# Altium PCB Receiver_PCB.PcbDoc
Units mil, origin at the board's own origin, x right, y up, seen from the top; angles counter-clockwise.
Board outline 708.66 x 1515.75 mil, 2 copper layers (Top Layer, Bottom Layer); 28 components, 25 nets, 95 pads, 67 vias.
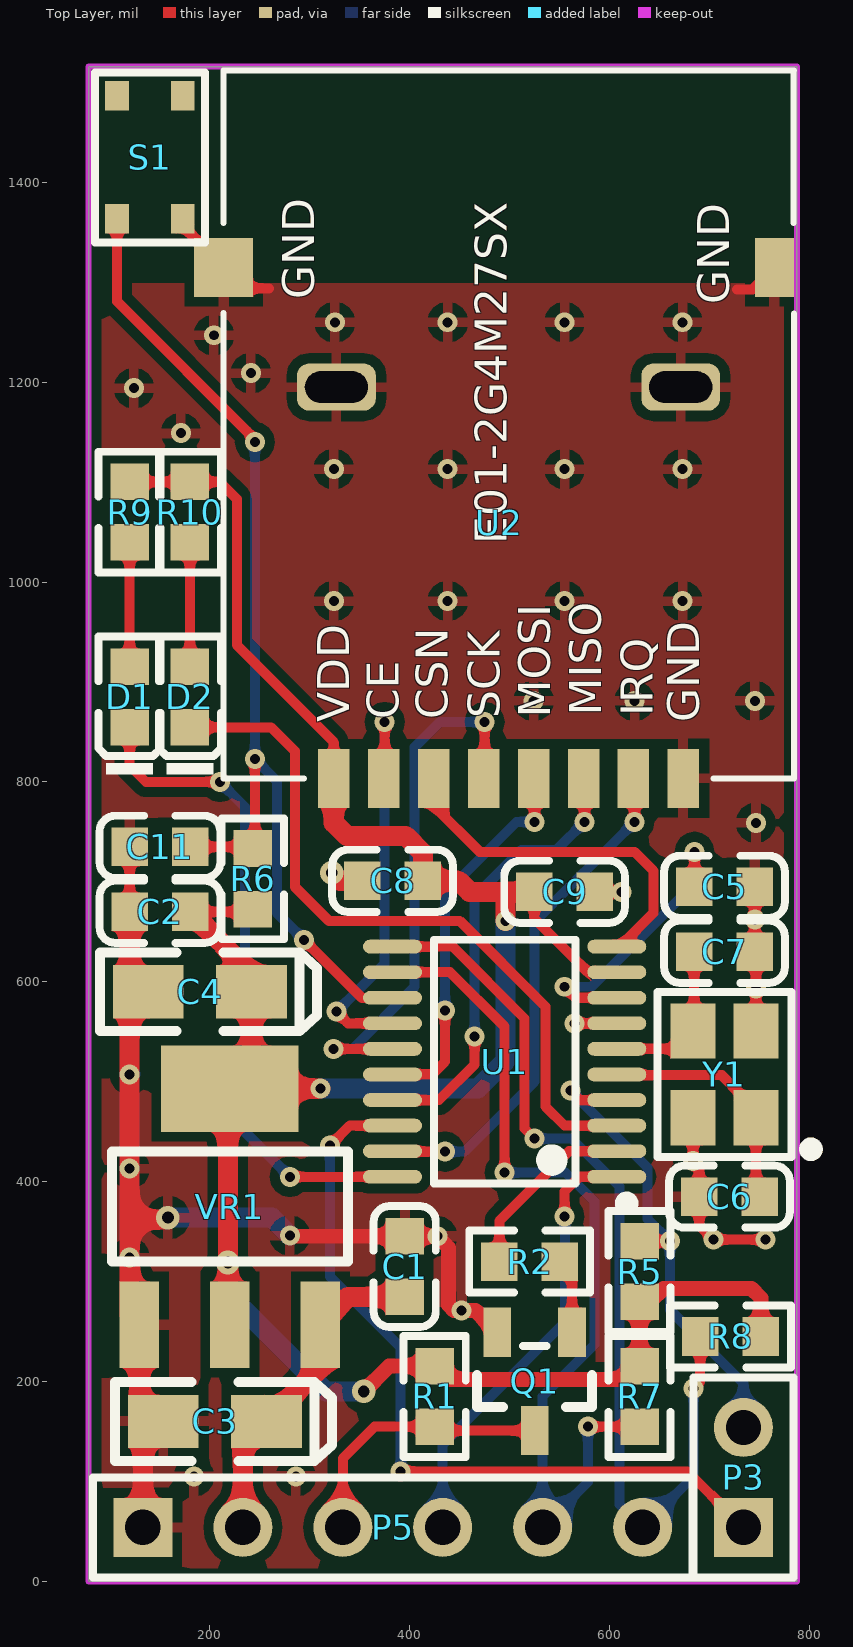
[diagram p0: Top Layer view]
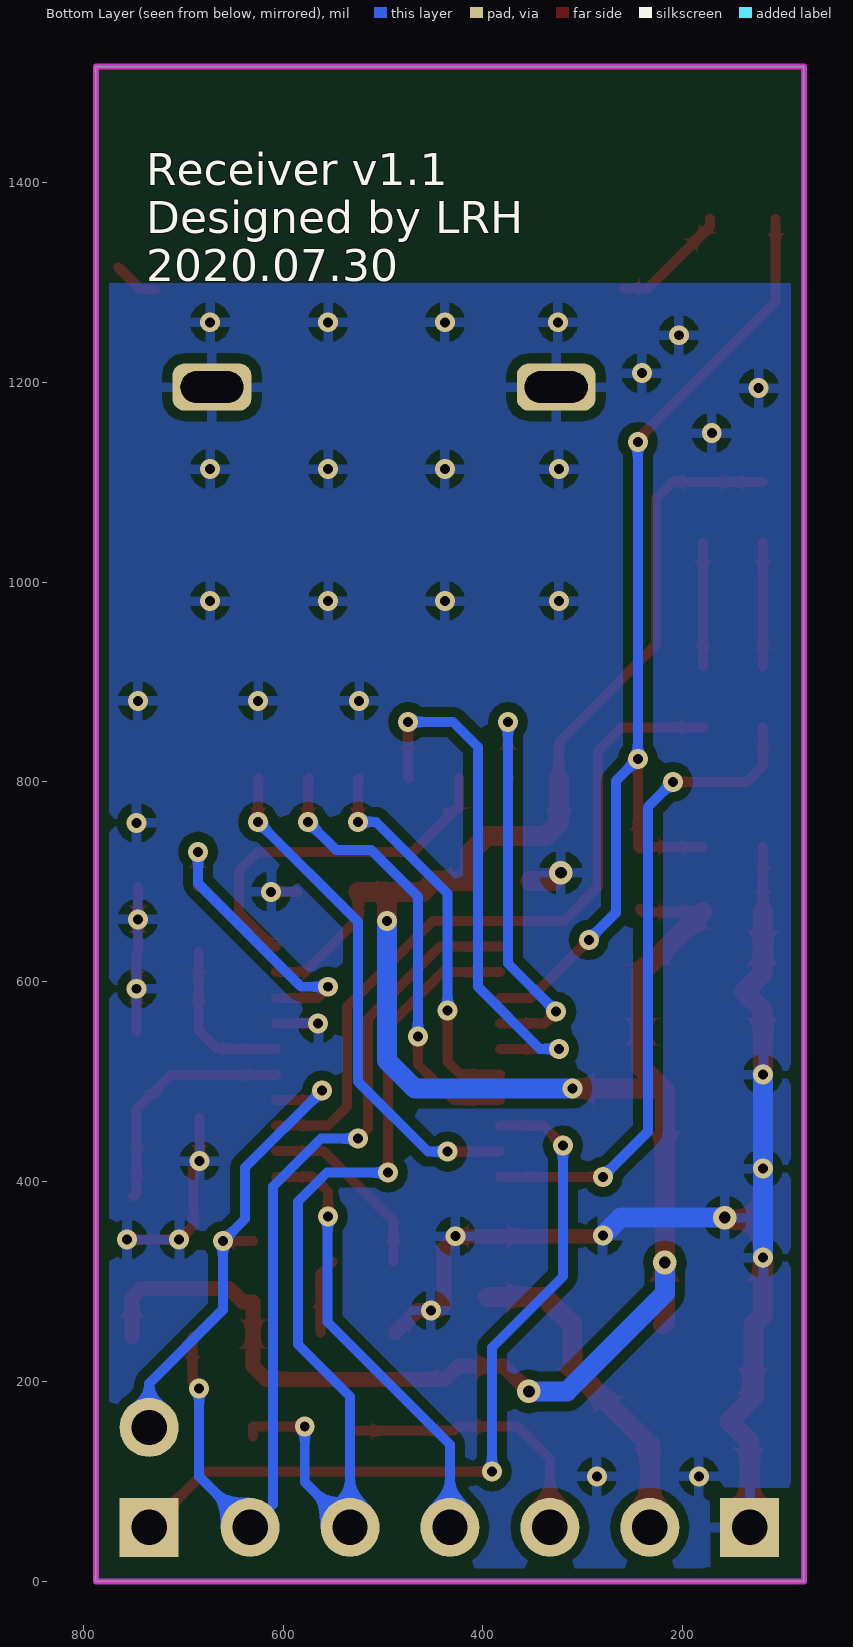
[diagram p1: Bottom Layer view, seen from below]
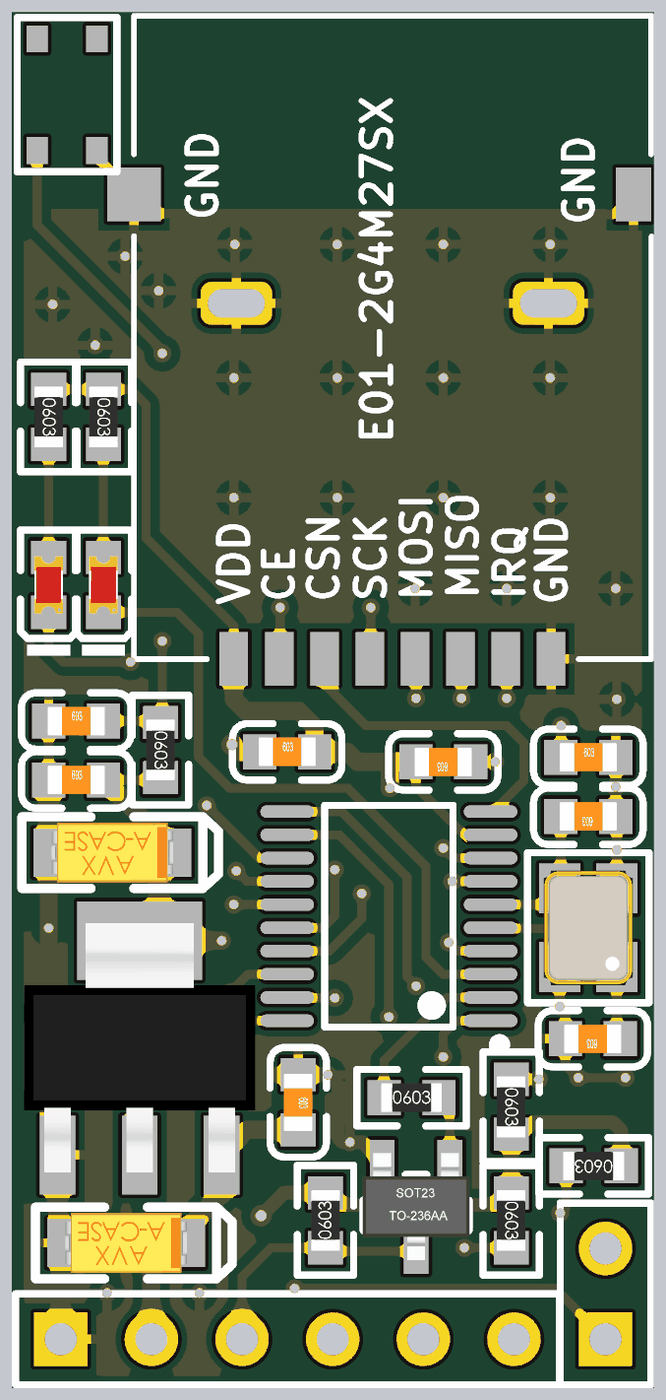
[diagram p2: 3D render of the assembled board from above, using the file's embedded part models]

## Layer stack, top to bottom
Top Solder: solder mask 0.4, Solder Resist, Dk 3.5
Top Layer: signal copper 1.4
Dielectric 1: dielectric 12.6, FR-4, Dk 4.8
Bottom Layer: signal copper 1.4
Bottom Solder: solder mask 0.4, Solder Resist, Dk 3.5

## Board outline
78.74,0 787.4,0 787.4,1515.75 78.74,1515.75

## Design rules (kind name [scope] priority, off if disabled: settings)
Clearance [All] p1: gap=10 ignorepadtopadclearanceinfootprint=FALSE except(0: Arc-Hole Track-Hole SMDPad-Hole THPad-Hole Via-Hole Fill-Hole Poly-Hole Region-Hole Text-Hole)
PolygonConnect [All] p1: connectstyle=Relief reliefconductorwidth=10 reliefentries=4 polygonreliefangle="90 Angle" airgapwidth=10
RoutingVias [All] p1: holewidth=10 width=20 viastyle="Through Hole" minholewidth=6 minwidth=10 maxholewidth=28 maxwidth=50
SolderMaskExpansion [All] p1: expansion=4
Width [All] p1: maxlimit=40 minlimit=10 preferedwidth=10
30 further rules are at their usual default settings.

## Components (designator, comment, footprint, x,y, rotation, side; value= is the part's Value field where it differs from the comment)
C1 "0.1uF" 0603_C 395,315 r270 top
C2 "0.1uF" 0603_C 150,670 r0 top
C3 "10uF" CASE-A_3216 205,160 r0 top
C4 "10uF" CASE-A_3216 190,590 r0 top
C5 "680nF" 0603_C 715,695 r0 top
C6 "20pF" 0603_C 720,385 r180 top
C7 "20pF" 0603_C 715,630 r180 top
C8 "10uF" 0603_C 382.8,701 r0 top
C9 "100nF" 0603_C 555,690 r180 top
C11 "100nF" 0603_C 150,735 r0 top
D1 "红灯 0603" 0603_LED_S1 119.69,885 r90 top
D2 "蓝灯 0603" 0603_LED_S1 180,885 r90 top
P3 "Header 2" HDR1X2 734,53.94 r90 top
P5 "Header 6" HDR1X6 133,53.94 r0 top
Q1 "SS8050 Y1" SOT-23(SOT-23-3) 525,200 r90 top
R1 "10KΩ" 0603_R 425,185 r90 top
R2 "1KΩ" 0603_R 520,320 r0 top
R5 "10KΩ" 0603_R 630,310 r270 top
R6 "10KΩ" 0603_R 243,703 r270 top
R7 "4.7KΩ" 0603_R 630,185 r270 top
R8 "4.7KΩ" 0603_R 721,245 r180 top
R9 "470Ω" 0603_R 119.69,1070 r270 top
R10 "470Ω" 0603_R 180,1070 r270 top
S1 "SW-PB" SMD_KEY_4P 140,1425 r90 top
U1 "STM8S103F3P6" TSSOP-20 495,520 r90 top
U2 "E01-2G4M27SX" E01-2G4M27SX 323.94,803.43 r90 top
VR1 "AMS1117-3.3" SOT-223 220,375 r270 top
Y1 "12MHZ 20PF 10PPM" SMD-3225_4P 715,507.2 r90 top

## Footprints (in the part's own frame and the unit in brackets; to place one, negate y for a bottom-side part, rotate by r counter-clockwise, add the part's x,y. Pads: shape width x height; smd on the part's side, far side on the other; paste and mask are expansions set on the pad)
0603_C [mm]
  rect 0.93x0.98 smd: 1(-0.77,0) 2(0.77,0)
  silkscreen extent -1.53,-0.79 1.54,0.79, body extent -0.8,-0.4 0.8,0.4, height 0.3
0603_LED_S1 [mm]
  rect 0.93x0.98 smd: A(0.77,0) K(-0.77,0)
  silkscreen extent -1.98,-0.79 1.54,0.79, body extent -0.8,-0.4 0.8,0.4, height 0.6
0603_R [mm]
  rect 0.93x0.98 smd: 1(-0.77,0) 2(0.77,0)
  silkscreen extent -1.53,-0.79 1.54,0.79, body extent -0.85,-0.4 0.85,0.4, height 0.56
CASE-A_3216 [mm]
  rect 1.8x1.35 smd: 1(1.31,0) 2(-1.31,0)
  silkscreen extent -2.54,-1 2.97,1, body extent -1.7,-0.84 1.7,0.84, height 1.71
E01-2G4M27SX [mm] "23*14mm-S"
  rect 1.5x0.8 smd: 1(0,0) 2(0,-1.27) 3(0,-2.54) 4(0,-3.81) 5(0,-5.08) 6(0,-6.35) 7(0,-7.62) 8(0,-8.89)
  rrect50% 1.2x2 hole 0.8 slot 1.6 at 90 deg: 9(9.95,-8.82) 10(9.95,-0.07)
  rect 1.5x1 smd: 9(12.994,-11.203)
  rect 1.5x1.5 smd: 10(12.994,2.797)
  silkscreen extent -0.01,-11.7 17.99,2.8
HDR1X2 [mm] "Connector; Header; 2 Position"
  rect 1.5x1.5 hole 0.9: 1(0,0)
  round 1.5 hole 0.9: 2(2.54,0)
  silkscreen extent -1.27,-1.27 3.81,1.27
HDR1X6 [mm] "Connector; Header; 6 Position"
  rect 1.5x1.5 hole 0.9: 1(0,0)
  round 1.5 hole 0.9: 2(2.54,0) 3(5.08,0) 4(7.62,0) 5(10.16,0) 6(12.7,0)
  silkscreen extent -1.27,-1.27 13.97,1.27
SMD-3225_4P [mm]
  rect 1.4x1.15 smd: 1(-1.1,-0.8) 2(1.1,-0.8) 3(1.1,0.8) 4(-1.1,0.8)
  silkscreen extent -2.1,-2.35 2.1,1.7, body extent -1.6,-1.25 1.6,1.25, height 0.61
SMD_KEY_4P [mm]
  rect 0.75x0.6 smd: 1(-1.563,0.837) 2(-1.563,-0.838) 3(1.562,0.837) 4(1.562,-0.838)
  silkscreen extent -2.16,-1.4 2.16,1.4
SOT-23(SOT-23-3) [mm]
  rect 1.25x0.7 smd: 1(1.25,-0.95) 2(1.25,0.95) 3(-1.25,0)
  silkscreen extent -0.65,-1.46 0.9,1.46, body extent -1.5,-1.5 1.5,1.5, height 1.3
SOT-223 [mm]
  rect 2.2x1 smd: 1(3,-2.3) 2(3,0) 3(3,2.3)
  rect 2.2x3.5 smd: 2(-3,0)
  silkscreen extent -1.4,-3 1.4,3, body extent -3.49,-3.24 3.49,3.24, height 1.64
TSSOP-20 [mm]
  oval 0.35x1.5 smd: 1(-2.925,-2.85) 2(-2.275,-2.85) 3(-1.625,-2.85) 4(-0.975,-2.85) 5(-0.325,-2.85) 6(0.325,-2.85) 7(0.975,-2.85) 8(1.625,-2.85) 9(2.275,-2.85) 10(2.925,-2.85) 11(2.925,2.85) 12(2.275,2.85) 13(1.625,2.85) 14(0.975,2.85) 15(0.325,2.85) 16(-0.325,2.85) 17(-0.975,2.85) 18(-1.625,2.85) 19(-2.275,2.85) 20(-2.925,2.85)
  silkscreen extent -3.75,-3.25 3.1,1.8

## Part data
C1 C2 C5 C8 C9 C11: library part "0603 1uF (105) 10% 50V", "贴片电容", Package=0603, SuppliersPartNumber=C15849, ComponentLink1Description=供应商, ComponentLink1URL=http://www.szlcsc.com/product/details_16531.html, Supplier=LC
C3 C4: library part "3216 10uF (106) 10% 16V", "钽电容", Package=3216, SuppliersPartNumber=C7171, ComponentLink1Description=供应商, ComponentLink1URL=http://www.szlcsc.com/product/details_7643.html, Supplier=LC
C6 C7: library part "0603 1.0pF (010) 0.25pF 50V", "贴片电容", Package=0603, SuppliersPartNumber=C23969, ComponentLink1Description=供应商, ComponentLink1URL=http://www.szlcsc.com/product/details_24709.html, Supplier=LC
D1: library part "0603 红灯", "发光二极管", Package=0603, SuppliersPartNumber=C2286, ComponentLink1Description=供应商, ComponentLink1URL=http://www.szlcsc.com/product/details_2659.html, Supplier=LC
D2: library part "0603 蓝灯", "发光二极管", Package=0603, SuppliersPartNumber=C72041, ComponentLink1Description=供应商, ComponentLink1URL=http://www.szlcsc.com/product/details_73150.html, Supplier=LC
P3: "Header, 2-Pin", LatestRevisionDate=17-Jul-2002, LatestRevisionNote="Re-released for DXP Platform.", Publisher="Altium Limited"
P5: "Header, 6-Pin", LatestRevisionDate=17-Jul-2002, LatestRevisionNote="Re-released for DXP Platform.", Publisher="Altium Limited"
Q1: library part "SOT-23 SS8050 Y1", "三极管", Package=SOT-23, SuppliersPartNumber=C2150, ComponentLink1Description=供应商, ComponentLink1URL=http://www.szlcsc.com/product/details_2507.html, Supplier=LC
R1 R2 R5 R6: library part "0603 1KΩ (1001) 1%", "贴片电阻", Package=0603, SuppliersPartNumber=C21190, ComponentLink1Description=供应商, ComponentLink1URL=http://www.szlcsc.com/product/details_21904.html, Supplier=LC
R7 R8: library part "0603 1.5KΩ (1501) 1%", "贴片电阻", Package=0603, SuppliersPartNumber=C22843, ComponentLink1Description=供应商, ComponentLink1URL=http://www.szlcsc.com/product/details_23570.html, Supplier=LC
R9 R10: library part "0603 1.1KΩ (1101) 1%", "贴片电阻", Package=0603, SuppliersPartNumber=C22764, ComponentLink1Description=供应商, ComponentLink1URL=http://www.szlcsc.com/product/details_23491.html, Supplier=LC
S1: "Switch", LatestRevisionDate=17-Jul-2002, LatestRevisionNote="Re-released for DXP Platform.", PackageDescription="Switch; 2 Leads", PackageReference=SPST-2, Published=24-Mar-1999, Publisher="Altium Limited"
U1: "MCU", Package=TSSOP-20, SuppliersPartNumber=C55961, ComponentLink1Description=供应商, ComponentLink1URL=http://www.szlcsc.com/product/details_56989.html, Supplier=LC
VR1: library part "SOT-223 AMS1117-3.3", "低压差线性稳压(LDO)", Package=SOT-223, SuppliersPartNumber=C6186, ComponentLink1Description=供应商, ComponentLink1URL=http://www.szlcsc.com/product/details_6652.html, Supplier=LC
Y1: library part "SMD-3225_4P  12MHZ 20PF 10PPM", "贴片晶振", Package=SMD-3225_4P, SuppliersPartNumber=C9002, ComponentLink1Description=供应商, ComponentLink1URL=http://www.szlcsc.com/product/details_9522.html, Supplier=LC

## Via types
v1: diameter 20, hole 10, Top Layer to Bottom Layer, tented both sides, 63 vias
v2: diameter 23.62, hole 11.81, Top Layer to Bottom Layer, tented both sides, 4 vias

## Nets (pads, with @x,y where several pads share a name; then routed paths per layer and width w, separated by ;. In a path a pad name is that pad's centre, name@x,y a point inside that pad or via, vN(x,y) a via of type N, cw(c..) or ccw(c..) an arc to the next point about the centre after c; other vN are vias at no path point)
3V3: C2.2 C4.1 C8.2 C9.2 R1.2 R5.2 R6.2 R7.1 R8.1 R9.1 R10.1 U1.9 U2.1 VR1.2 | length 2564.4
  Top Layer w10: R9.1 R10.1 209.69,1100.31 227,1083 227,937 323.94,840.06 U2.1 ; C2.2 240.32,670 R6.2 ; C9.2 524.68,663.32 578.43,609.57 U1.9
  Top Layer w15: v2(354,190) 379.32,215.32 R1.2 438.32,202 616.69,202 R7.1 R5.2 640.68,279.68 654,293 742,293 751.31,283.69 R8.1
  Top Layer w20: C2.2 241.57,608.74 C4.1 241.57,514.69 VR1.2@220,493.11 ; VR1.2@220,256.89 218,258.89 v2(218,319) 218,491.11 VR1.2@220,493.11 ; v1(310.55,493.11) VR1.2@220,493.11 ; U2.1 323.94,759.06 337,746 396,746 413.11,728.89 C8.2 449,701 460,690 495,690 ; v1(496,661) 496,689 495,690 ; C9.2 495,690
  Bottom Layer w20: v2(218,319) 218,288 316,190 v2(354,190) ; v1(310.55,493.11) 468.11,493.11 496,521 v1(496,661)
+5V: C1.2 C3.1 P5.2 VR1.3 | length 331
  Top Layer w20: P5.2 233,136.43 C3.1 310.55,213.98 VR1.3 338.35,284.69 C1.2
CE: U1.14 U2.2 | length 427.9
  Top Layer w10: v1(326.69,570) 338.31,558.39 U1.14 ; U2.2 375,804.49 v1(375,860)
  Bottom Layer w10: v1(326.69,570) 375,618.31 v1(375,860)
CSN: U1.10 U2.3 | length 367.2
  Top Layer w10: U2.3 423.94,776.06 470,730 625,730 644,711 644,669 610.16,635.16 U1.10
GND: C1.1 C2.1 C3.2 C4.2 C5.2 C6.2 C7.1 C8.1 C9.1 C11.1 P5.1 Q1.2 S1.2 U1.7 U2.8 U2.9 U2.10 VR1.1 Y1.2 Y1.4 | length 1948.8
  Top Layer w10: C2.1 C11.1 ; S1.2 172.99,1355.83 213.82,1315 234.82,1294 259,1294 ; v1(565,558.39) U1.7 ; C9.1 v1(612,690) ; Y1.4 v1(683.5,420.5) 689.68,414.32 C6.2 689.68,356.31 v1(704,342) v1(756,342) ; 727.66,1293 743,1293 U2.9@765,1315 ; C5.2 v1(745.32,662.5) C7.1 746.5,628.82 v1(746.5,593) Y1.2
  Top Layer w15: v1(280,346) 280.69,345.31 C1.1 v1(427.58,345.31) 439,333.9 439,276.32 444.32,271 v1(452,271) 465.81,271 Q1.2
  Top Layer w20: C2.1 119.69,608.74 C4.2 119.69,571.26 v1(119.69,507) v1(119.69,413) 119.69,362 ; P5.1 133,139.57 C3.2 129.45,183.98 VR1.1 119.69,266.65 v1(119.69,324) 119.69,362 ; v2(158,364) 156,362 119.69,362 ; v2(322,709) 330,701 C8.1
  Bottom Layer w20: v1(119.69,324) v1(119.69,413) v1(119.69,507) v1@120.37,507.69 ; v2(158,364) 262,364 v1(280,346)
  other v1: 184,104.94 286,104.94 746.5,759 524,881 625,881 745.32,881 324,981 438,981 555,981 673,981 324,1113 438,1113 555,1113 673,1113 171,1149 124,1194 241,1209 204,1247 325,1260 438,1260 554.98,1260 673,1260
I2C_SCL: P5.5 R7.2 U1.12 | length 911.3
  Top Layer w10: U1.12 440.43,609.57 495,555 v1(495,409) ; v1(578.32,154.68) R7.2 R7.2@630,145
  Bottom Layer w10: v1(495,409) 556,409 585,380 585,237 533,185 P5.5 578.32,99.25 v1(578.32,154.68)
I2C_SDA: P5.6 R8.2 U1.11 | length 956.8
  Top Layer w10: U1.11 443.13,635.16 515,563.28 515,453 v1(525,443) ; v1(684,193) 690.68,199.68 R8.2
  Bottom Layer w10: v1(525,443) 562,443 610,395 610,76.94 P5.6 684,104.94 v1(684,193)
IRQ: U1.19 U2.7 | length 516.7
  Top Layer w10: U1.19 383.23,430 v1(435.31,430) ; U2.7 625,802.36 v1(625,760)
  Bottom Layer w10: v1(435.31,430) 455,430 525,500 525,660 v1(625,760)
MISO: U1.17 U2.6 | length 449.7
  Top Layer w10: U1.17 429.41,481.61 465,517.2 v1(465,545) ; U2.6 575,802.36 v1(575,760)
  Bottom Layer w10: v1(465,545) 465,685 512,732 547,732 v1(575,760)
MOSI: U1.16 U2.5 | length 389.4
  Top Layer w10: U1.16 422.52,507.2 435.31,520 v1(435.31,571.26) ; U2.5 525,802.36 v1(525,760)
  Bottom Layer w10: v1(435.31,571.26) 435.31,688.32 507,760 v1(525,760)
NetC5_1: C5.1 U1.8 | length 296.6
  Top Layer w10: v1(555,595) 566.02,583.98 U1.8 ; C5.1 685,695.32 v1(685,730)
  Bottom Layer w10: v1(555,595) 582,595 685,698 v1(685,730)
NetD1_A: D1.A R9.2 | length 124.4
  Top Layer w10: D1.A R9.2
NetD2_A: D2.A R10.2 | length 124.4
  Top Layer w10: D2.A R10.2
NetQ1_1: Q1.1 R2.2 | length 75.8
  Top Layer w10: R2.2 562.4,307.91 Q1.1
NRST: P3.2 R5.1 U1.4 | length 489.1
  Top Layer w10: v1(561,491) 570.39,481.61 U1.4 ; R5.1 v1(660.31,340.31)
  Bottom Layer w10: v1(561,491) 638,414 638,362.63 v1(660.31,340.31) 660.31,271.69 734,198 P3.2
OSCIN: C6.1 U1.5 Y1.1 | length 243.1
  Top Layer w10: U1.5 607.2,506.46 712.35,506.46 746.5,472.32 Y1.1 746.5,388.82 C6.1
OSCOUT: C7.2 U1.6 Y1.3 | length 163.6
  Top Layer w10: U1.6 665.79,532.8 Y1.3 684.68,551.69 C7.2
PC3: C11.2 R6.1 S1.1 U1.13 | length 1065.6
  Top Layer w10: S1.1 107.05,1280.95 245,1143 v1(245,1140) ; C11.2 241.31,735 R6.1 245,735.31 v1(245,823) ; v1(294,642) 352.02,583.98 U1.13
  Bottom Layer w10: v1(245,1140) v1(245,823) 267,801 267,669 v1(294,642)
PD3: D1.K U1.20 | length 662.8
  Top Layer w10: D1.K@120,854.37 D1.K 119.69,816.32 136,800 v1(210,800) ; v1(280,404.84) U1.20
  Bottom Layer w10: v1(210,800) 235,775 235,449.84 v1(280,404.84)
PD6: D2.K U1.3 | length 730.6
  Top Layer w10: D2.K 261.31,854.69 285,831 285,695 319,661 450,661 536,575 536,475 554.98,456.02 U1.3
PPM: P5.4 U1.1 | length 445.3
  Top Layer w10: v1(555,365) 555,390 569.84,404.84 U1.1
  Bottom Layer w10: P5.4 433,137 555.43,259.43 555.43,364.57 v1(555,365)
SBUS: P5.3 Q1.3 R1.1 | length 275.8
  Top Layer w10: P5.3 333,123 364.69,154.69 R1.1 428.9,150.79 Q1.3
SCK: U1.15 U2.4 | length 543.1
  Top Layer w10: v1(323.94,532.8) U1.15 ; U2.4 475,804.49 v1(475,860)
  Bottom Layer w10: v1(323.94,532.8) 342.8,532.8 405,595 405,835 430,860 v1(475,860)
SWIM: P3.1 U1.18 | length 792.7
  Top Layer w10: v1(320,436) 340.02,456.02 U1.18 ; v1(391,110) 677.94,110 P3.1
  Bottom Layer w10: v1(320,436) 320,305 391,234 v1(391,110)
UART1_TX: R2.1 U1.2 | length 187.1
  Top Layer w10: R2.1 489.69,360.69 559.43,430.43 U1.2
pads on no net: S1.3 S1.4

## Polygon pours and split planes (outlines as drawn)
GND on Top Layer "GND_L01_P016" (solid, remove dead copper, pour order 16): 78.74,1299.21 787.4,1299.21 787.4,0 78.74,0
GND on Bottom Layer "GND_L02_P018" (solid, remove dead copper, pour order 18): 78.74,1299.21 787.4,1299.21 787.4,0 78.74,0

## Keep-outs
Keep-Out Layer:
  the board outline again, w6

## Silkscreen, mask and mechanical layers (free items; w line width, h text height)
Bottom Overlay:
  text "Receiver v1.1 / Designed by LRH / 2020.07.30" at 737,1301 h32
Mechanical 1:
  the board outline again, w6
Drill Drawing:
  circle w10: c1423.62,672.27 r33.33
  lines w10: 1390.29,555.61 1456.96,555.61 1423.62,488.94 1390.29,555.61 ; 1390.29,805.61 1406.96,805.61 1423.62,788.94 1440.29,805.61 1456.96,805.61 1440.29,822.27 1456.96,838.94 1440.29,838.94 1423.62,855.61 1406.96,838.94 1390.29,838.94 1406.96,822.27 1390.29,805.61 ; 1390.29,938.94 1456.96,938.94 1456.96,1005.61 1390.29,1005.61 1390.29,938.94
  lines w15: 1330.5,443.94 15102.6,443.94 ; 1330.5,1043.94 15102.6,1043.94 ; 1881.38,293.94 1881.38,1193.94 ; 2421.24,293.94 2421.24,1193.94 ; 3520.92,293.94 3520.92,1193.94 ; 4026.79,293.94 4026.79,1193.94 ; 4760.59,293.94 4760.59,1193.94 ; 6260.14,293.94 6260.14,1193.94 ; 6849.99,293.94 6849.99,1193.94 ; 7939.68,293.94 7939.68,1193.94 ; 9089.34,293.94 9089.34,1193.94 ; 9943.1,293.94 9943.1,1193.94 ; 11276.71,293.94 11276.71,1193.94 ; 12610.32,293.94 12610.32,1193.94 ; 13700,293.94 13700,1193.94 ; 1330.5,293.94 15102.6,293.94 15102.6,1193.94 1330.5,1193.94 1330.5,293.94
  text "Symbol" at 1420.5,1088.94 h72
  text "Count" at 1926.38,1088.94 h72
  text "Hole Size" at 2466.24,1088.94 h72
  text "Plated" at 3565.92,1088.94 h72
  text "Hole Type" at 4071.79,1088.94 h72
  text "Drill Layer Pair" at 4805.59,1088.94 h72
  text "Via/Pad" at 6305.14,1088.94 h72
  text "Pad Shape" at 6894.99,1088.94 h72
  text "Template" at 7984.68,1088.94 h72
  text "Description" at 9134.34,1088.94 h72
  text "Hole Tolerance (+)" at 9988.1,1088.94 h72
  text "Hole Tolerance (-)" at 11321.71,1088.94 h72
  text "Hole Length" at 12655.32,1088.94 h72
  text "Routed Path Length" at 13745,1088.94 h72
  text "2" at 1926.38,938.94 h60
  text "31.50mil (0.800mm)" at 2466.24,938.94 h60
  text "PTH" at 3565.92,938.94 h60
  text "Slot" at 4071.79,938.94 h60
  text "Top Layer - Bottom Layer" at 4805.59,938.94 h60
  text "Pad" at 6305.14,938.94 h60
  text "Rounded Rectangle" at 6894.99,938.94 h60
  text "r200_120h80_160r50" at 7984.68,938.94 h60
  text "62.99mil (1.600mm)" at 12655.32,938.94 h60
  text "31.50mil (0.800mm)" at 13745,938.94 h60
  text "4" at 1926.38,788.94 h60
  text "11.81mil (0.300mm)" at 2466.24,788.94 h60
  text "PTH" at 3565.92,788.94 h60
  text "Round" at 4071.79,788.94 h60
  text "Top Layer - Bottom Layer" at 4805.59,788.94 h60
  text "Via" at 6305.14,788.94 h60
  text "Rounded" at 6894.99,788.94 h60
  text "v60h30m0mx0" at 7984.68,788.94 h60
  text "-" at 12655.32,788.94 h60
  text "-" at 13745,788.94 h60
  text "8" at 1926.38,638.94 h60
  text "35.43mil (0.900mm)" at 2466.24,638.94 h60
  text "PTH" at 3565.92,638.94 h60
  text "Round" at 4071.79,638.94 h60
  text "Top Layer - Bottom Layer" at 4805.59,638.94 h60
  text "Pad" at 6305.14,638.94 h60
  text "(Mixed)" at 6894.99,638.94 h60
  text "(Mixed)" at 7984.68,638.94 h60
  text "-" at 12655.32,638.94 h60
  text "-" at 13745,638.94 h60
  text "63" at 1926.38,488.94 h60
  text "10.00mil (0.254mm)" at 2466.24,488.94 h60
  text "PTH" at 3565.92,488.94 h60
  text "Round" at 4071.79,488.94 h60
  text "Top Layer - Bottom Layer" at 4805.59,488.94 h60
  text "Via" at 6305.14,488.94 h60
  text "Rounded" at 6894.99,488.94 h60
  text "v51h25m0mx0" at 7984.68,488.94 h60
  text "-" at 12655.32,488.94 h60
  text "-" at 13745,488.94 h60
  text "77 Total" at 1926.38,338.94 h60
  text "Slot definitions :" at 1420.5,193.97 h60
  text "Routed Path Length" at 2453.19,193.97 h60
  text "= Calculated from tool start centre position to tool end centre position." at 3555.86,193.97 h60
  text "Hole Length" at 2453.19,93.99 h60
  text "= Routed Path Length + Tool Size = Slot length as defined in the PCB layout" at 3145.99,93.99 h60

## Text inside footprints (layer, text, board x,y; h text height)
U2: Top Overlay "GND" at 719.69,1278.19 h32 r90; Top Overlay "GND" at 689.8,859.69 h32 r90; Top Overlay "IRQ" at 643.35,865.59 h32 r90; Top Overlay "MISO" at 591.77,866.38 h32 r90; Top Overlay "MOSI" at 540.59,864.41 h32 r90; Top Overlay "SCK" at 490.2,863.62 h32 r90; Top Overlay "CSN" at 438.23,862.83 h32 r90; Top Overlay "CE" at 389.02,862.83 h32 r90; Top Overlay "GND" at 304.69,1283.19 h32 r90; Top Overlay "VDD" at 339.41,859.69 h32 r90